# EAGLE board draft6 (EAGLE 9.2.2)
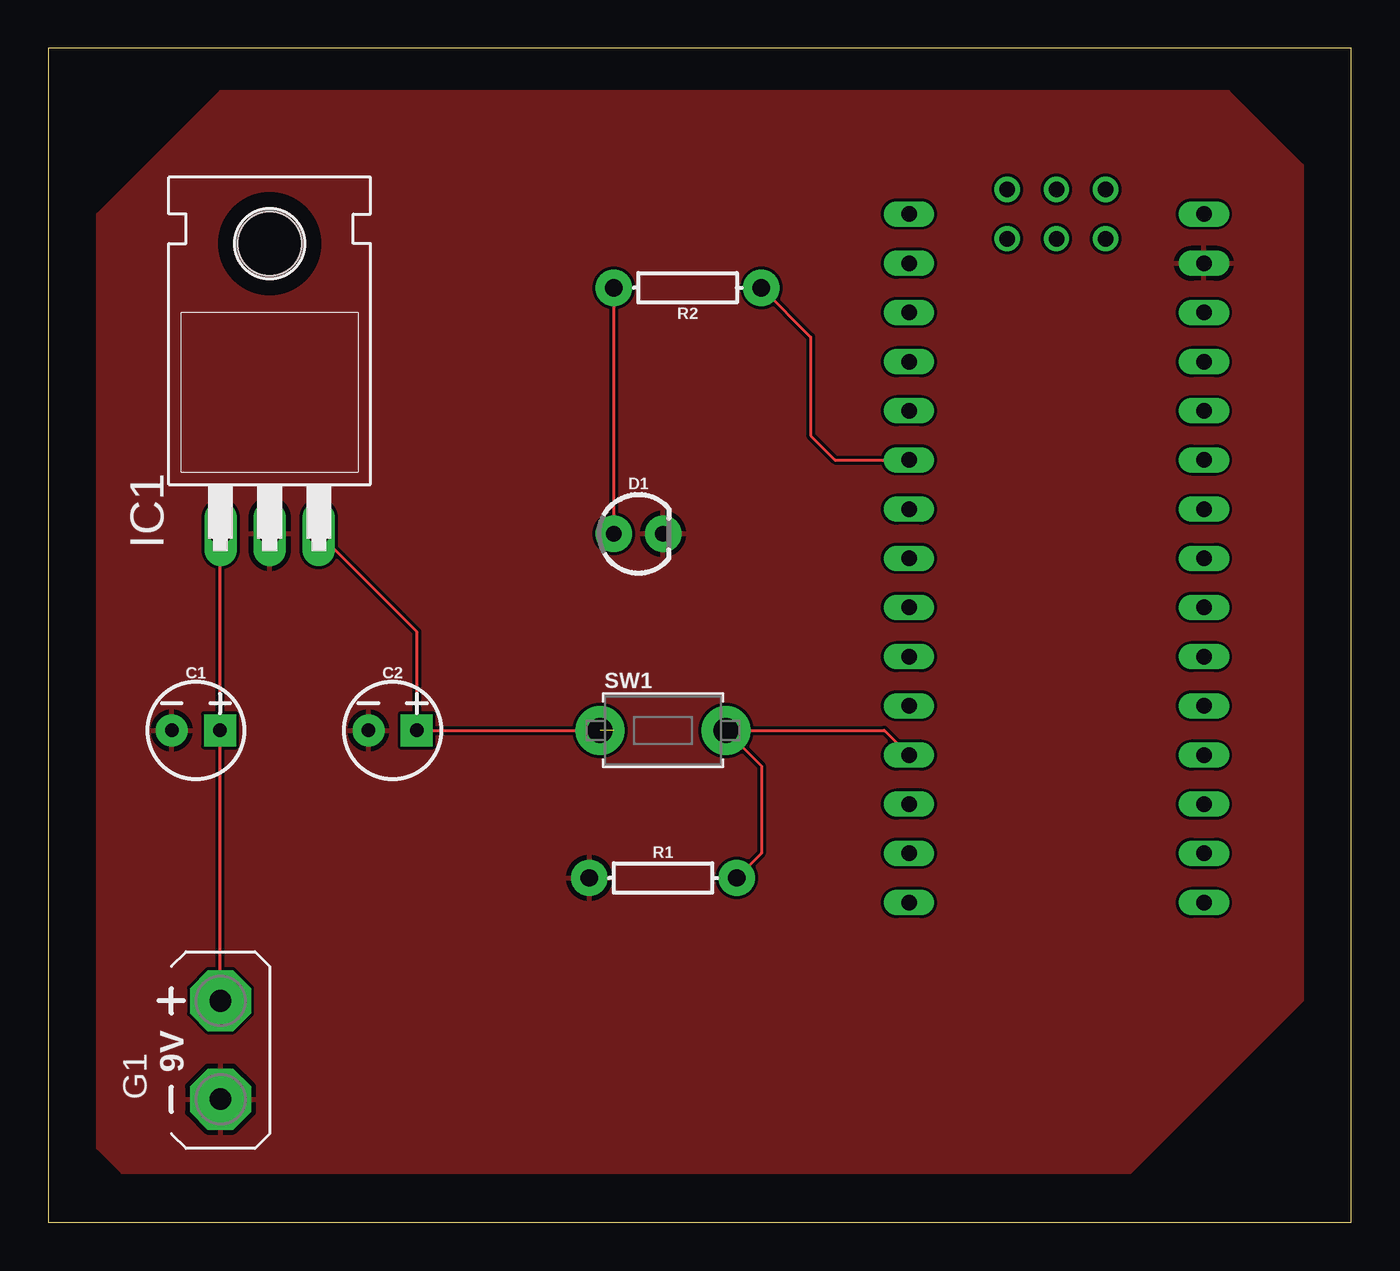
[diagram p0: board, top side]
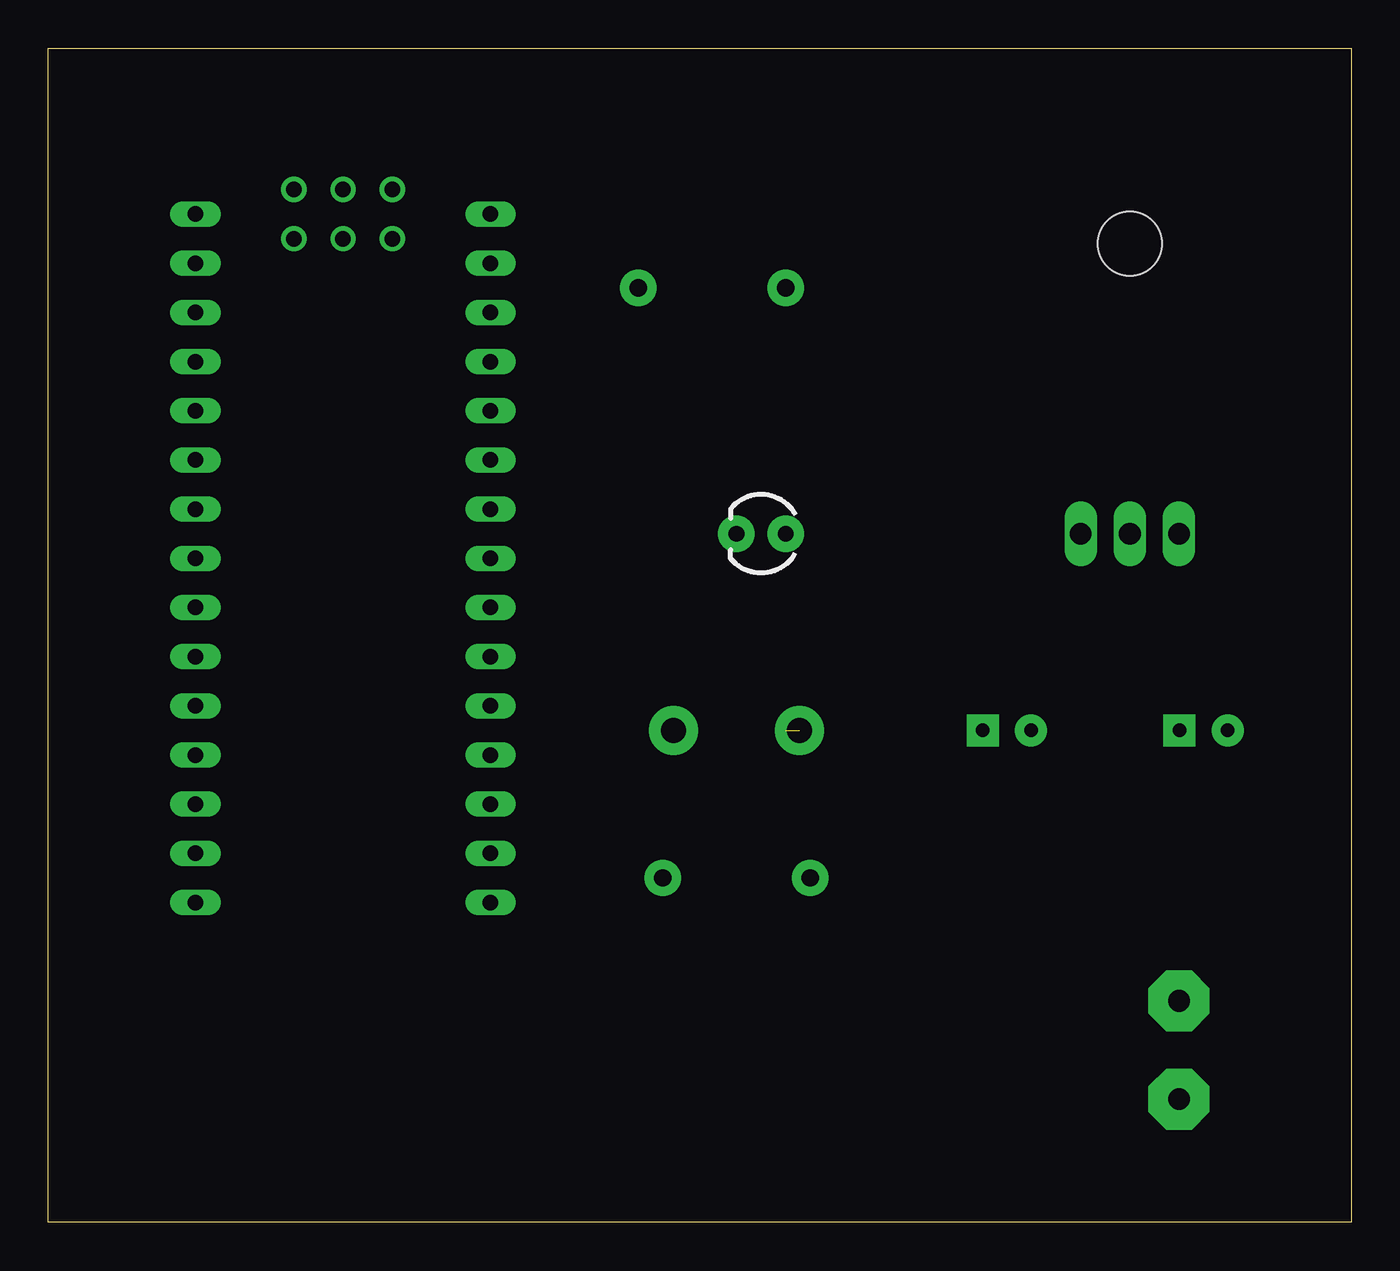
[diagram p1: board, bottom side, seen from below]

Size 67.29 x 60.63 mm. Coordinates in mm from the lower left corner, seen from the top.
Outline: 0,0 67.29,0 67.29,60.63 0,60.63 0,0
Copper layers (1*16): Top 0.035mm / dielectric 1.5mm / Bottom 0.035mm
Design rules "default": minimum track width 6mil, minimum drill 0.35mm, track to track 6mil, track to pad 6mil, pad to pad 6mil, via to via 6mil, smd to smd 6mil, copper to edge 40mil, drill to drill 6mil, minimum pad ring 10mil, minimum via ring 8mil, stop-mask expansion 4mil, vias tented up to drill 0mil, thermal gap 10mil

## Footprints (pad centres in the part's own frame; a part is rotated, then mirrored left to right if it is on the bottom)
CPOL-RADIAL-2.5MM-5MM = drill 0.7 pad 1.651 square: 1 1.25,0 | drill 0.7 pad 1.651: 2 -1.25,0
LED_3MM = drill 0.813 pad 1.88: A -1.27,0; K 1.27,0
AB9V = drill 1.118 pad 3.15 octagon: + 0,2.54; - 0,-2.54
TO220H = drill 1.118 long: 1 -2.54,-10.16; 2 0,-10.16; 3 2.54,-10.16 | hole 3.302: 0,4.826
AXIAL-0.3EZ = drill 0.9 pad 1.88: P$1 -3.81,0; P$2 3.81,0
TACT_PANA-EVQ = drill 1.3 pad 2.54: P$1 -3.25,0; P$2 3.25,0
NANO = drill 0.8 long: 3.3V -10.16,24.13; 5V -10.16,-1.27; A0 -10.16,19.05; A1 -10.16,16.51; A2 -10.16,13.97; A3 -10.16,11.43; A4 -10.16,8.89; A5 -10.16,6.35; A6 -10.16,3.81; A7 -10.16,1.27; AREF -10.16,21.59; D2 5.08,1.27; D3 5.08,3.81; D4 5.08,6.35; D5 5.08,8.89; D6 5.08,11.43; D7 5.08,13.97; D8 5.08,16.51; D9 5.08,19.05; D10 5.08,21.59; D11 5.08,24.13; D12 5.08,26.67; D13 -10.16,26.67; GND -10.16,-6.35; GND1 5.08,-1.27; RAW -10.16,-8.89; RST -10.16,-3.81; RST1 5.08,-3.81; RX1 5.08,-6.35; TX0 5.08,-8.89 | drill 0.8: ICSP1 -5.08,-10.16; ICSP2 -5.08,-7.62; ICSP3 -2.54,-10.16; ICSP4 -2.54,-7.62; ICSP5 0,-10.16; ICSP6 0,-7.62

## Placement (x,y rotation side)
C1  10uF  [CPOL-RADIAL-2.5MM-5MM]  7.62,25.4 0 top
C2  10uF  [CPOL-RADIAL-2.5MM-5MM]  17.78,25.4 0 top
D1  [LED_3MM]  30.48,35.56 0 top
G1  AB9V  [AB9V]  8.89,8.89 0 top
IC1  7805T  [TO220H]  11.43,45.72 0 top
R1  100  [AXIAL-0.3EZ]  31.75,17.78 0 top
R2  100  [AXIAL-0.3EZ]  33.02,48.26 180 top
SW1  [TACT_PANA-EVQ]  31.75,25.4 0 top
U$1  NANO  [NANO]  49.53,43.18 180 top

## Library data of the parts
C1 C2 = SparkFun-Capacitors; PROD_ID: CAP-08440
D1 = SparkFun-LED; PROD_ID: DIO-08794
G1 = battery
IC1 SW1 = adafruit
R1 R2 = SparkFun-Resistors; PROD_ID: RES-12181
U$1 = Arduino-clone

## Nets
GND: C1.2 C2.2 D1.K G1.- IC1.2 R1.P$1 U$1.GND
N$1: C1.1 G1.+ IC1.1
N$3: C2.1 IC1.3 SW1.P$1
N$4: R1.P$2 SW1.P$2 U$1.D9
N$5: R2.P$1 U$1.D3
N$6: D1.A R2.P$2
VCC: U$1.5V

## Tracks (layer width: path | path; a pad name or v marks a point on that pad's centre or on a via)
GND
  pour Top: 2.54,52.07 8.89,58.42 60.96,58.42 64.77,54.61 64.77,11.43 55.88,2.54 3.81,2.54 2.54,3.81
N$1
  Top 0.152: G1.+ 8.87,11.45 C1.1 8.87,35.54 IC1.1
N$3  (1 unrouted)
  Top 0.152: IC1.3 19.03,30.5 C2.1 29.21,25.4
N$4
  Top 0.152: R1.P$2 36.83,19.05 36.83,23.57 SW1.P$2 43.18,25.4 U$1.D9
N$5
  Top 0.152: R2.P$1 39.37,45.72 39.37,40.64 40.64,39.37 U$1.D3
N$6
  Top 0.152: D1.A R2.P$2